# Altium PCB max5025.PcbDoc
Units mil, origin at the board's own origin, x right, y up, seen from the top; angles counter-clockwise.
Board outline 1535 x 1185 mil, 2 copper layers (Top Layer, Bottom Layer); 23 components, 10 nets, 61 pads, 3 vias.
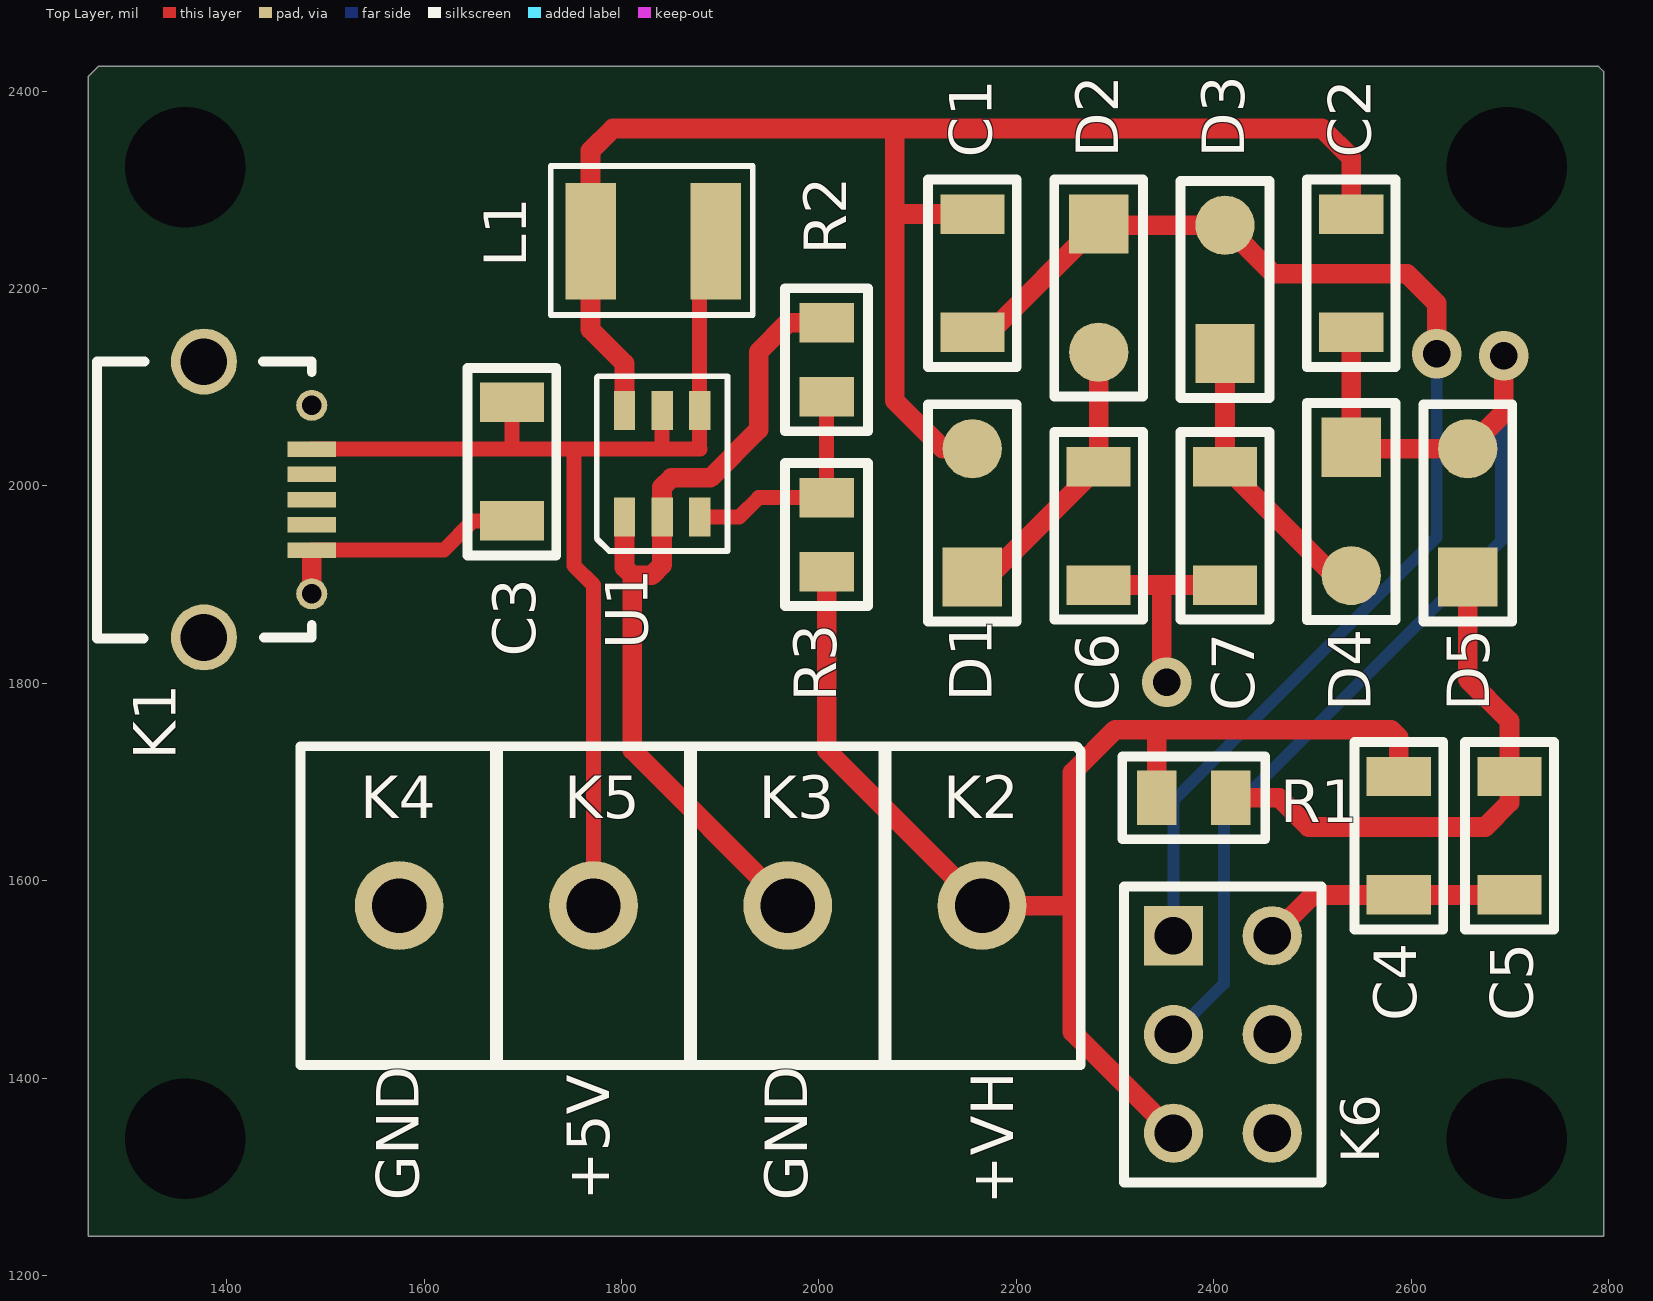
[diagram p0: Top Layer view]
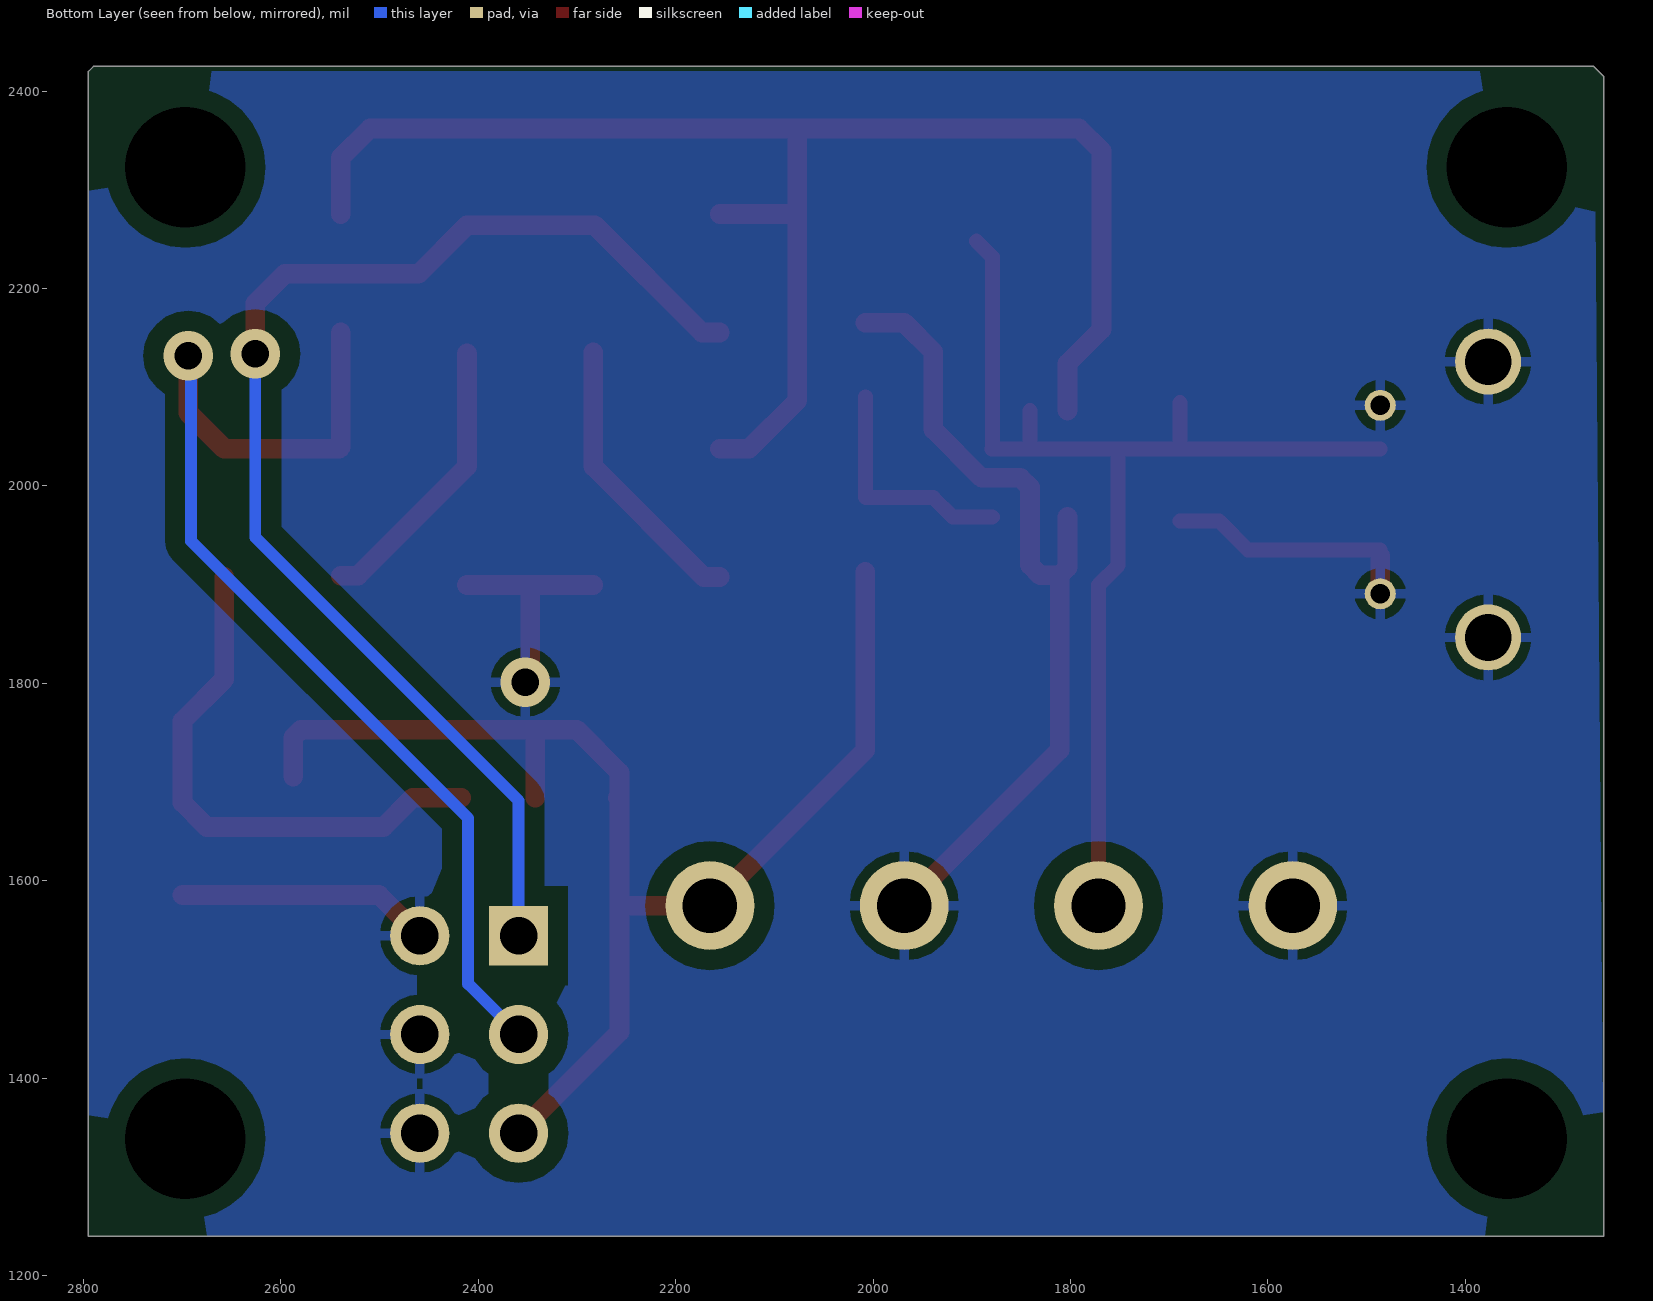
[diagram p1: Bottom Layer view, seen from below]

## Layer stack, top to bottom
Top Solder: solder mask 0.4, Solder Resist, Dk 3.5
Top Layer: signal copper 1.4
Dielectric 1: dielectric 12.6, FR-4, Dk 4.8
Bottom Layer: signal copper 1.4
Bottom Solder: solder mask 0.4, Solder Resist, Dk 3.5

## Board outline
1260,1240 1260,2415 1270,2425 2790,2425 2795,2420 2795,1240

## Design rules (kind name [scope] priority, off if disabled: settings)
Clearance ClearPolygon [InPolygon] p1: gap=20
Clearance Clearance_1 [All] p2: gap=7
HoleSize [All] p1: absolutevalues=TRUE maxlimit=300 minlimit=1 maxpercent=80.000 minpercent=20.000
MinimumSolderMaskSliver [All] p1: minsoldermaskwidth=0
PolygonConnect [All] p1: connectstyle=Relief reliefconductorwidth=10 reliefentries=4 polygonreliefangle="90 Angle" airgapwidth=10
RoutingVias [All] p1: holewidth=28 width=50 viastyle="Through Hole" minholewidth=28 minwidth=50 maxholewidth=28 maxwidth=50
SilkToSilkClearance [All] p1: silktosilkclearance=0
SilkToSolderMaskClearance [IsPad] p1: minsilkscreentomaskgap=5 clearancetoexposedcopper=TRUE
SolderMaskExpansion [All] p1: expansion=4
Width [All] p1: maxlimit=40 minlimit=10 preferedwidth=15
25 further rules are at their usual default settings.

## Components (designator, comment, footprint, x,y, rotation, side; value= is the part's Value field where it differs from the comment)
C1 "cap1206" SM1206 2155.51,2155.51 r90 top
C2 "cap1206" SM1206 2539.37,2155.51 r90 top
C3 "cap1206" SM1206 1688.98,1964.57 r90 top
C4 "cap1206" SM1206 2587.6,1585.63 r90 top
C5 "cap1206" SM1206 2699.8,1585.63 r90 top
C6 "cap1206" SM1206 2283.46,1899.61 r90 top
C7 "cap1206" SM1206 2411.42,1899.61 r90 top
D1 "Diode" SM1206_diode 2155.51,2017.72 r270 top
D2 "Diode" SM1206_diode 2283.46,2155.51 r90 top
D3 "Diode" SM1206_diode 2411.42,2244.09 r270 top
D4 "Diode" SM1206_diode 2539.37,1929.13 r90 top
D5 "Diode" SM1206_diode 2657.48,2017.72 r270 top
K1 "USB_micro" USB_micro 1486.22,2037.4 r270 top
K2 "SCREW_1" SCREW_CON_8.1mm 2165.35,1574.8 r180 top
K3 "SCREW_1" SCREW_CON_8.1mm 1968.5,1574.8 r180 top
K4 "SCREW_1" SCREW_CON_8.1mm 1574.8,1574.8 r180 top
K5 "SCREW_1" SCREW_CON_8.1mm 1771.65,1574.8 r0 top
K6 "2x3_PLS_2.54mm" "2x3 pin 2.54mm" 2359.25,1544.29 r0 top
L1 "inductance SMT 3.2x4.5 mm" inductor_LQH43PN 1779.53,2248.03 r90 top
R1 "res0805" SM0805 2417.32,1684.06 r180 top
R2 "res0805" SM0805 2007.87,2165.35 r270 top
R3 "res0805" SM0805 2007.87,1988.19 r270 top
U1 "boost conv" SOT-23_6 1803.15,1968.5 r0 top

## Footprints (in the part's own frame and the unit in brackets; to place one, negate y for a bottom-side part, rotate by r counter-clockwise, add the part's x,y. Pads: shape width x height; smd on the part's side, far side on the other; paste and mask are expansions set on the pad)
"2x3 pin 2.54mm" [mil] "2x3 pin 2.54mm"
  rect 60x60 hole 38: 1(0,0)
  round 60 hole 38: 2(100,0) 3(0,-100) 4(100,-100) 5(0,-200) 6(100,-200)
  silkscreen extent -50,-250 150,50
inductor_LQH43PN [mm] "inductor"
  rect 3x1.3 smd: 1(0,-2.941) 2(0,0.275)
  silkscreen extent -1.91,-3.9 1.93,1.3
SCREW_CON_8.1mm [mil]
  round 90 hole 55.12: 1(0,0)
  silkscreen extent -100,-161 100,161
SM0805 [mil]
  rect 40x55 smd: 1(0,0) 2(75,0)
  silkscreen extent -35,-42 110,42
SM1206 [mil]
  rect 40x65 smd: 1(0,0) 2(120,0)
  silkscreen extent -35,-45 155,45
SM1206_diode [mil]
  round 60 smd: 1(-20,0)
  rect 60x60 smd: 2(110,0)
  silkscreen extent -65,-45 155,45
SOT-23_6 [mm]
  rect 0.55x1 smd: 1(0,0) 2(0.966,0) 3(1.932,0) 4(1.932,2.74) 5(0.966,2.743) 6(0,2.743)
  silkscreen extent -0.71,-0.87 2.65,3.63
USB_micro [mm] "Sunrom_4653"
  rect 0.4x1.24 smd: 1(0,0) 2(0.65,0) 3(1.3,0) 4(1.95,0) 5(2.6,0)
  round 0.8 hole 0.5: 6(-1.125,0) 8(3.725,0)
  round 1.7 hole 1.2: 7(-2.25,-2.775) 9(4.85,-2.775)
  silkscreen extent -2.25,-5.53 4.87,0

## Part data
C1 C2 C3 C4 C5 C6 C7: "Capacitor"
K1: "Sunrom"
K6: "6 pin vertical 2x3 2.54mm"
L1: library part inductor_LQH43PN
R1 R2 R3: "Resistor"
U1: library part MAX5025_sot23_6

## Free pads (board coordinates)
  round 60 hole 122.05 unplated: 0(1358.27,1338.58) 0(1358.27,2322.83) 0(2696.85,1338.58) 0(2696.85,2322.83)

## Via types
v1: diameter 50, hole 28, Top Layer to Bottom Layer, 3 vias

## Nets (pads, with @x,y where several pads share a name; then routed paths per layer and width w, separated by ;. In a path a pad name is that pad's centre, name@x,y a point inside that pad or via, vN(x,y) a via of type N, cw(c..) or ccw(c..) an arc to the next point about the centre after c; other vN are vias at no path point)
GND: C3.1 C4.1 C5.1 C6.1 C7.1 K1.5 K1.6 K1.7 K1.8 K1.9 K3.1 K4.1 K6.2 K6.4 K6.6 R2.1 U1.1 U1.2 | length 1596.8
  Top Layer w15: K1.5 1620.08,1935.04 1649.61,1964.57 C3.1
  Top Layer w20: K1.8 K1.5@1486.22,1929.13 ; U1.1 1803.15,1917.32 1811.02,1909.45 ; K3.1 1811.02,1732.28 1811.02,1909.45 ; R2.1 1968.5,2165.35 1938.98,2135.83 1938.98,2057.09 1890.08,2008.19 1850.71,2008.19 1841.18,1998.66 U1.2 1841.18,1919.92 1830.71,1909.45 1811.02,1909.45 ; C6.1 2347.44,1899.61 ; v1(2352.36,1801.18) 2347.44,1806.1 2347.44,1899.61 ; C7.1 2347.44,1899.61 ; K6.2 2500.59,1585.63 C4.1 C5.1
NetC1_1: C1.1 D2.2 D3.1 K6.1 | length 1299.4
  Top Layer w20: C1.1 2173.46,2155.51 2282.05,2264.09 D3.1 2460.63,2214.88 2596.14,2214.88 2625.98,2185.04 v1(2625.98,2133.86)
  Bottom Layer w12: K6.1 2359.25,1681.1 2625.98,1947.83 v1(2625.98,2133.86)
NetC1_2: C1.2 C2.2 D1.1 L1.2 U1.6 | length 1580.9
  Top Layer w20: U1.6 1803.15,2124.02 1768.7,2158.47 L1.2 1768.7,2339.57 1791.34,2362.2 2076.77,2362.2 ; D1.1 2125.67,2037.72 2076.77,2086.61 2076.77,2273.62 ; C1.2 2078.66,2275.51 2076.77,2273.62 ; C2.2 2539.37,2332.68 2509.84,2362.2 2076.77,2362.2 ; 2076.77,2273.62 2076.77,2362.2
NetC2_1: C2.1 D4.2 D5.1 K6.3 | length 1169.3
  Top Layer w20: C2.1 D4.2 2540.79,2037.72 D5.1 2693.9,2074.13 v1(2693.9,2131.89)
  Bottom Layer w12: K6.3 2410.43,1495.47 2410.43,1663.39 2690.94,1943.9 v1@2690.94,2131.89
NetC3_2: C3.2 K1.1 K5.1 L1.1 U1.4 U1.5 | length 1168.3
  Top Layer w15: K1.1 1692.91,2037.4 ; C3.2 1688.98,2041.34 1692.91,2037.4 ; K5.1 1771.65,1899.61 1751.97,1919.29 1751.97,2037.4 ; 1841.18,2038.03 U1.5 ; 1879.21,2038.11 U1.4 1879.21,2231.94 L1.1 ; 1879.92,2037.4 1751.97,2037.4 ; 1692.91,2037.4 1751.97,2037.4
NetC4_2: C4.2 K2.1 K6.5 R1.2 R3.2 | length 1367.1
  Top Layer w20: R3.2 2007.87,1732.28 K2.1 2255.91,1574.8 2256.89,1575.79 ; 2258.86,1684.06 2256.89,1682.09 ; R1.2 2342.32,1751.18 2340.55,1752.95 ; K6.5 2256.89,1446.65 2256.89,1575.79 ; C4.2 2587.6,1745.08 2579.72,1752.95 2340.55,1752.95 ; 2256.89,1575.79 2256.89,1682.09 ; 2256.89,1682.09 2256.89,1709.65 2300.2,1752.95 2340.55,1752.95
NetC5_2: C5.2 D5.2 R1.1 | length 551
  Top Layer w20: R1.1 2466.54,1684.06 2496.06,1654.53 2675.2,1654.53 2699.8,1679.13 C5.2 2699.8,1761.81 2657.48,1804.13 D5.2
NetC6_2: C6.2 D1.2 D2.1 | length 290.2
  Top Layer w20: D1.2 2171.57,1907.72 C6.2 D2.1
NetC7_2: C7.2 D3.2 D4.1 | length 288.2
  Top Layer w20: D3.2 C7.2 2521.89,1909.13 D4.1
NetR2_2: R2.2 R3.1 U1.3 | length 239
  Top Layer w15: U1.3 1919.29,1968.5 1938.98,1988.19 R3.1 R2.2
pads on no net: K1.2 K1.3 K1.4

## Polygon pours and split planes (outlines as drawn)
GND on Bottom Layer "btm gnd" (solid, remove dead copper, pour order 2): 1269.68,2421.26 1270.94,2420 2795,2420 2795,1249.72 2785.43,1240.16 2785.28,1240 1260,1240

## Silkscreen, mask and mechanical layers (free items; w line width, h text height)
Top Overlay:
  text "GND" at 1594.49,1275.59 h43.31 r90
  text "+5V" at 1787.4,1275.59 h43.31 r90
  text "GND" at 1988.19,1275.59 h43.31 r90
  text "+VH" at 2196.85,1271.65 h43.31 r90
Mechanical 1:
  lines w10: 1260,1240 2795,1240 2795,2420 2790,2425 1270,2425 1260,2415 1260,2380 1260,1240